# Altium PCB DCM_Flyback.PcbDoc
Units mil, origin at the board's own origin, x right, y up, seen from the top; angles counter-clockwise.
Board outline 5080 x 2800 mil, 2 copper layers (Top Layer, Bottom Layer), stack 61.756 mil thick; 39 components, 20 nets, 90 pads, 6 vias.
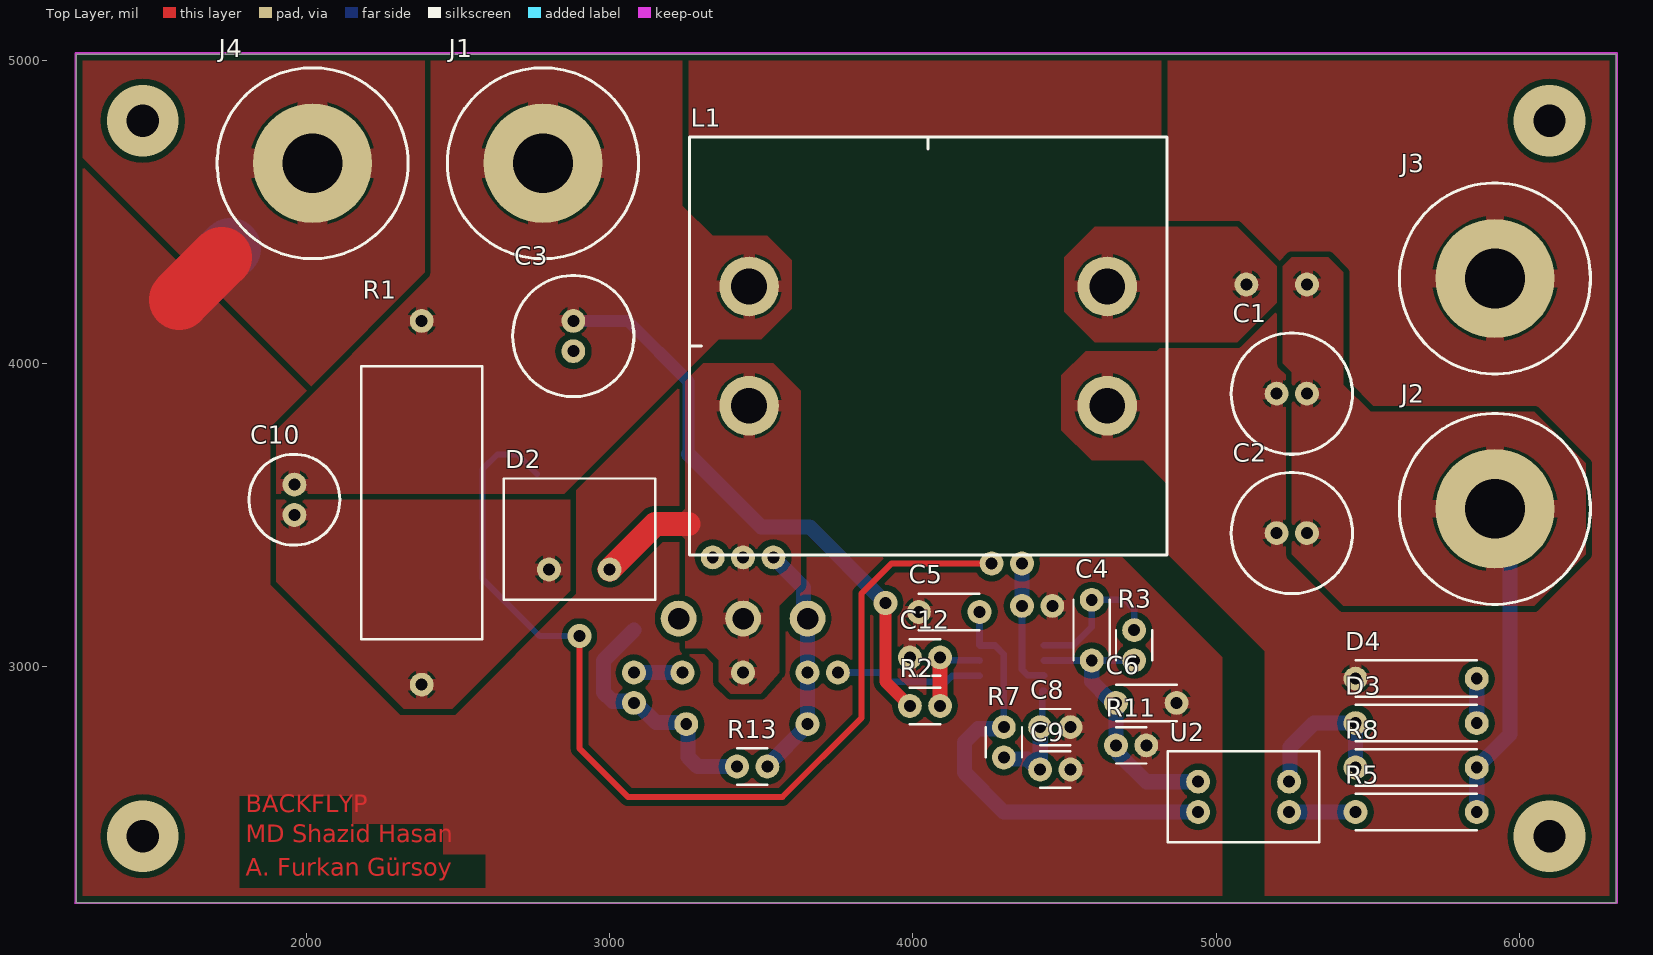
[diagram p0: Top Layer view]
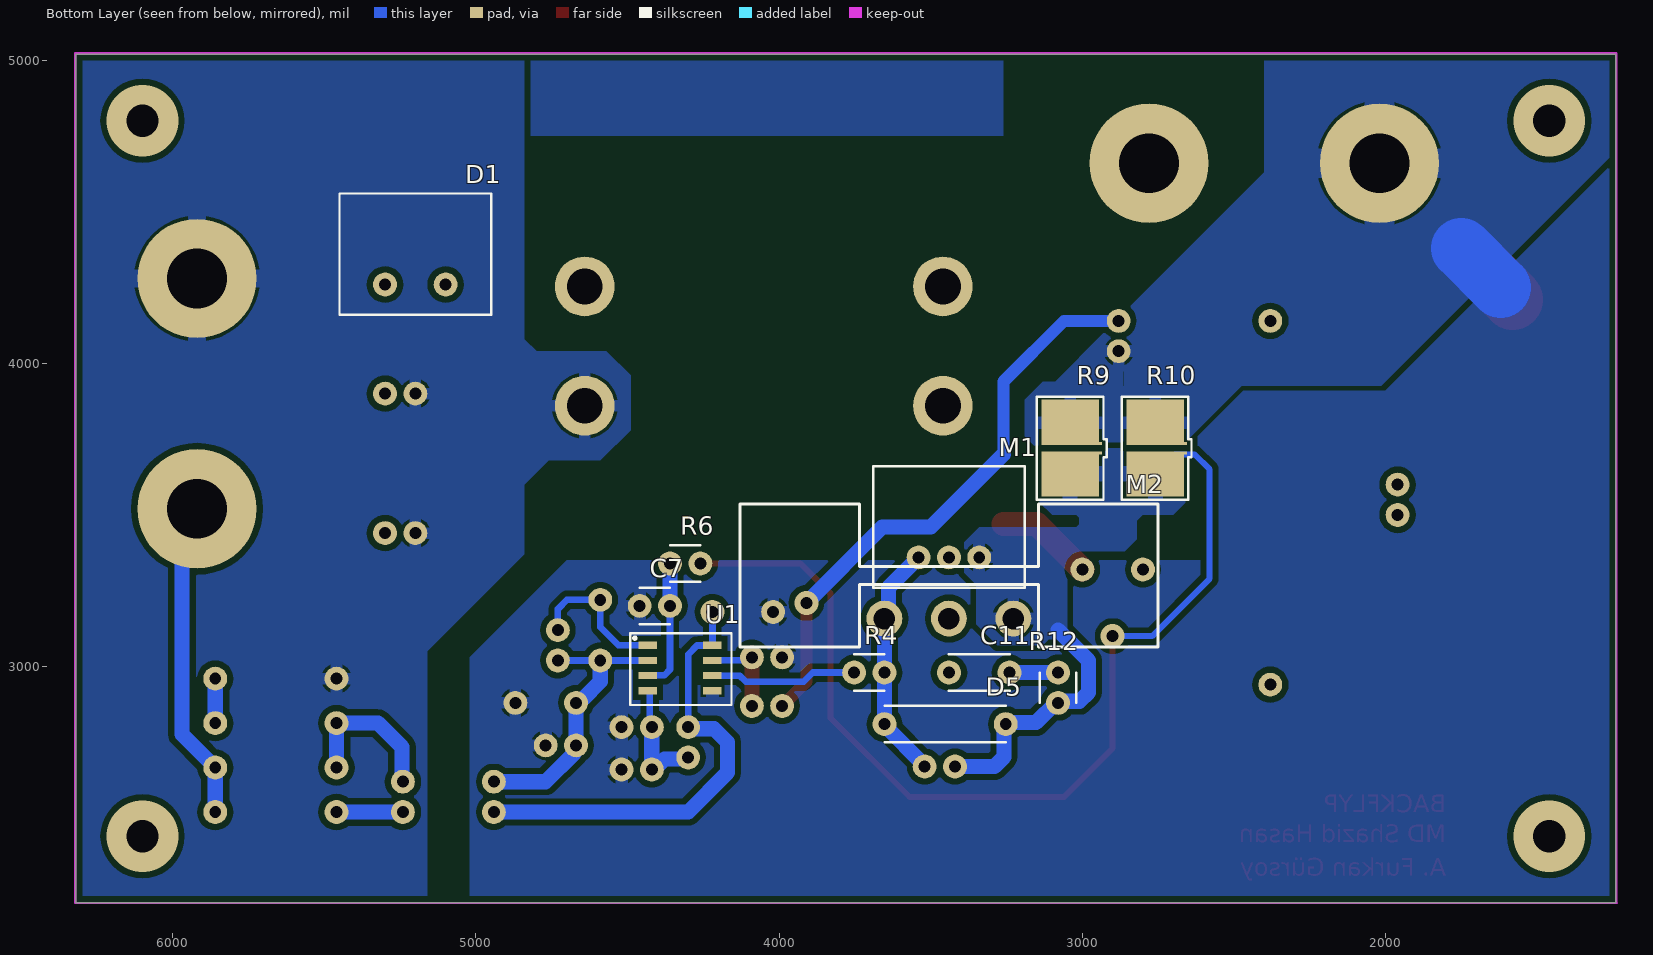
[diagram p1: Bottom Layer view, seen from below]

## Layer stack, top to bottom
Top Solder: solder mask 1, SM-001, Dk 4
Top Layer: signal copper 1.378
Dielectric 1: core 59, Core-043, Dk 4.3
Bottom Layer: signal copper 1.378
Bottom Solder: solder mask 1, SM-001, Dk 4

## Board outline
1240,2220 1240,5020 6320,5020 6320,2220

## Design rules (kind name [scope] priority, off if disabled: settings)
Clearance [All] p1: gap=20 ignorepadtopadclearanceinfootprint=FALSE
HoleSize [All] p1: absolutevalues=TRUE maxlimit=500 minlimit=1 maxpercent=80.000 minpercent=20.000
PolygonConnect [All] p1: connectstyle=Relief reliefconductorwidth=40 reliefentries=4 polygonreliefangle="90 Angle" airgapwidth=10
RoutingVias [All] p1: holewidth=28 width=50 viastyle="Through Hole" minholewidth=1 minwidth=1 maxholewidth=500 maxwidth=500
SilkToSilkClearance [All] p1: silktosilkclearance=0
SilkToSolderMaskClearance [IsPad] p1: minsilkscreentomaskgap=0 clearancetoexposedcopper=TRUE
SolderMaskExpansion [All] p1: expansion=4 istentingtop=FALSE
Width [All] p1: maxlimit=500 minlimit=10 preferedwidth=30 minimp=50.000000 maximp=50.000000 favimp=50.000000
27 further rules are at their usual default settings.

## Components (designator, comment, footprint, x,y, rotation, side; value= is the part's Value field where it differs from the comment)
C1 "100uF-63V" 100UF-63V 5300,3900 r270 top
C2 "100uF-63V" 100UF-63V 5300,3440 r270 top
C3 "100uF-63V" 100UF-63V 2880,4140 r0 top
C4 "Capacitor_lentil_100n" CAP-LENTIL-100N 4590,3220 r270 top
C5 "Capacitor_lentil_100n" CAP-LENTIL-100N 4220,3180 r180 top
C6 "Capacitor_lentil_100n" CAP-LENTIL-100N 4670,2880 r0 top
C7 "2.2nF" CAP-LENTIL-2.2N 4360,3200 r0 bottom
C8 "2.2.nF" CAP-LENTIL-2.2N 4420,2800 r0 top
C9 "2.2.nF" CAP-LENTIL-2.2N 4420,2660 r0 top
C10 "20uF-50V" 20uF-50V 1960,3600 r0 top
C11 "Capacitor_lentil_100n" Cap-lentil-100n 3440,2980 r180 bottom
C12 "2.2.nF" Cap-lentil-2.2n 3990,3030 r0 top
D1 "Secondary Diode" MBR10150 5300,4260 r180 bottom
D2 "Snubber Diode" MBR10150 2800,3320 r0 top
D3 "Zener" ZENER 5460,2813.33 r90 top
D4 "Zener" ZENER 5860,2960 r270 top
D5 "Zener" Zener 3652.6,2810 r90 bottom
J1 "4mm Con" CON-4MM 2780,4660 r270 top
J2 "4mm Con" CON-4MM 5920,3520 r0 top
J3 "4mm Con" CON-4MM 5920,4280 r0 top
J4 "4mm Con" CON-4MM 2020,4660 r270 top
L1 "Transformer" TRANSFORMER_EE3515 3263.15,4745.83 r0 top
M1 "MOSFET" MOSFET 3540,3360 r180 bottom
M2 "IRFP250N" "TO247 WITH HEATSINK" 3912.44,3300 r180 bottom
R1 "StoneRes" STONERES-5W 2380,4140 r0 top
R2 "IncRes" IncRes 3990,2870 r90 top
R3 "IncRes" IncRes 4730,3020 r180 top
R4 "IncRes" IncRes 3752.6,2980 r90 bottom
R5 "Resistor" RESISTOR 5860,2520 r270 top
R6 "IncRes" IncRes 4360,3340 r90 bottom
R7 "IncRes" IncRes 4300,2800 r0 top
R8 "Resistor" RESISTOR 5860,2666.67 r270 top
R9 "SMTDSB" ISB_SMT_V1_E 3040,3720 r270 bottom value=DSB
R10 "SMTDSB" ISB_SMT_V1_E 2760,3720 r270 bottom value=DSB
R11 "IncRes" IncRes 4770,2740 r270 top
R12 "IncRes" IncRes 3080,2980 r180 bottom
R13 "IncRes" IncRes 3420,2670 r90 top
U1 "UC3843AD" UC3843AD 4432.6,3070 r180 bottom
U2 "Opto" OPTO 5241.1,2520 r180 top

## Footprints (in the part's own frame and the unit in brackets; to place one, negate y for a bottom-side part, rotate by r counter-clockwise, add the part's x,y. Pads: shape width x height; smd on the part's side, far side on the other; paste and mask are expansions set on the pad)
20uF-50V [mm]
  round 2 hole 1: +(0,0) -(0,-2.54)
  silkscreen extent -3.81,-5.08 3.81,2.54
100UF-63V [mm]
  round 2 hole 1: +(0,0) -(0,-2.54)
  silkscreen extent -5.08,-6.35 5.08,3.81
CAP-LENTIL-2.2N [mm]
  round 2 hole 1: 1(0,0) 2(2.54,0)
  silkscreen extent 0,-1.52 2.54,1.52
Cap-lentil-2.2n [mm]
  round 2 hole 1: 1(0,0) 2(2.54,0)
  silkscreen extent 0,-1.52 2.54,1.52
CAP-LENTIL-100N [mm] "C?"
  round 2 hole 1: 1(0,0) 2(5.08,0)
  silkscreen extent 0,-1.52 5.08,1.52
Cap-lentil-100n [mm] "C?"
  round 2 hole 1: 1(0,0) 2(5.08,0)
  silkscreen extent 0,-1.52 5.08,1.52
CON-4MM [mm] "J?"
  round 10 hole 5: 1(0,0)
  silkscreen extent -8,-8 8,8
IncRes [mm]
  round 2 hole 1: 1(0,0) 2(0,-2.54)
  silkscreen extent -1.52,-2.54 1.52,0
ISB_SMT_V1_E [mil] "7.3 mm x 4.4 mm x 1.0 mm (max), Y:IKAHRAMAN, YT:23.11.2017,K:PPOSPOS,KT;18.12.2017"
  rect 150x190 smd: 1(-85,0) 2(85,0)
  rect 10x20 smd: 3(-15,95) 4(15,95)
  silkscreen extent -170,-110 170,120, body extent -140,-79 140,79, height 31
MBR10150 [mm]
  round 2 hole 1: A(5.08,0) C(0,0)
  silkscreen extent -3.81,-2.54 8.89,7.62
MOSFET [mm]
  round 2 hole 1: D(2.54,0) G(0,0) S(5.08,0)
  silkscreen extent -3.81,-2.54 8.89,7.62
OPTO [mm]
  round 2 hole 1: 1(0,0) 2(0,-2.54) 3(7.62,-2.54) 4(7.62,0)
  silkscreen extent -2.54,-5.08 10.16,2.54
RESISTOR [mm] "R?"
  round 2 hole 1: 1(0,0) 2(0,-10.16)
  silkscreen extent -1.52,-10.16 1.52,0
STONERES-5W [mm]
  round 2 hole 1: 1(0,0) 2(0,-30.48)
  silkscreen extent -5.08,-26.67 5.08,-3.81
"TO247 WITH HEATSINK" [mm]
  round 3 hole 1.8: D(12,-3.6) G(6.6,-3.6) S(17.4,-3.6)
  silkscreen extent -5.5,-6 29.5,6
TRANSFORMER_EE3515 [mm]
  round 5 hole 3: 1(5,-12.5) 2(5,-22.5) 3(35,-12.5) 4(35,-22.5)
  silkscreen extent 0,-35 40,0
UC3843AD [mm]
  rect 1.55x0.6 smd mask+0.07: 1(0,0) 2(0,-1.27) 3(0,-2.54) 4(0,-3.81) 5(5.4,-3.81) 6(5.4,-2.54) 7(5.4,-1.27) 8(5.4,0)
  silkscreen extent -1.5,-5 7,1
ZENER [mm]
  round 2 hole 1: A(0,-10.16) C(0,0)
  silkscreen extent -1.52,-10.16 1.52,0
Zener [mm]
  round 2 hole 1: A(0,-10.16) C(0,0)
  silkscreen extent -1.52,-10.16 1.52,0

## Part data
C7 C8 C9 C12: library part Cap-Lentil-2.2n
R9 R10: library part ISB_RES-SMT, "RES SMD 2817 1% 5W C", Manufacturer=Isabellenhutte, SAPPartNumber=DSB, Approved=EKARAGOZ, Checked/RevisedBy=CYEGIN, PackageDescription=DSB, PackageReference=SMT, Published=26-10-2017, Publisher=PPOSPOS, Version=1.0

## Via types
v1: diameter 236.22, hole 106.3, Top Layer to Bottom Layer, 4 vias
v2: diameter 78.74, hole 39.37, Top Layer to Bottom Layer, 2 vias

## Nets (pads, with @x,y where several pads share a name; then routed paths per layer and width w, separated by ;. In a path a pad name is that pad's centre, name@x,y a point inside that pad or via, vN(x,y) a via of type N, cw(c..) or ccw(c..) an arc to the next point about the centre after c; other vN are vias at no path point)
FB: C4.2 C6.1 R3.1 R11.2 U1.2 U2.3 | length 948.5
  Bottom Layer w22: U1.2 C4.2 R3.1
  Bottom Layer w50: C4.2 4590,2950 4645.63,2894.37 4647.85,2894.37 4662.22,2880 C6.1 R11.2 4675.5,2734.5 4675.5,2715.18 4770.68,2620 U2.3
GND: C3.- C5.2 C6.2 C7.2 C8.2 C9.2 C12.1 J4.1 R9.1 R9.3 R10.1 R10.3 R11.1 U1.5 | length 381.8
  Top Layer w200: 1580,4210 1720,4350
  Bottom Layer w200: 1620,4250 1750,4380
NetC4_1: C4.1 R3.2 U1.1 | length 494.7
  Bottom Layer w22: U1.1 4530,3070 4590,3130 C4.1 4700,3220 4730,3190 R3.2
NetC7_1: C7.1 R6.1 U1.3 | length 430.9
  Bottom Layer w22: C7.1 4360,2990 4379.19,2970.81 4431.79,2970.81 U1.3
  Bottom Layer w50: C7.1 R6.1
NetC8_1: C8.1 C9.1 R7.2 U1.4 | length 405
  Bottom Layer w22: C8.1 4426.3,2806.3 4426.3,2919.19 4427.11,2920 U1.4
  Bottom Layer w50: R7.2 4305.5,2694.5 4377.72,2694.5 4412.22,2660 C9.1 C8.1
NetC10_-: C10.- D2.C R1.2
NetC11_1: C11.1 D2.A L1.2 M1.D M2.D | length 322.1
  Top Layer w80: D2.A 3150,3470 3260,3470
NetC11_2: C11.2 R12.1 | length 160
  Bottom Layer w50: R12.1 C11.2
NetC12_2: C12.2 R2.2 U1.7 | length 294.1
  Top Layer w50: R2.2 C12.2
  Bottom Layer w22: C12.2 4099.19,3020.81 4219.19,3020.81 U1.7
NetD1_A: D1.A L1.3
NetD3_A: D3.A D4.C | length 146.7
  Bottom Layer w50: D3.A D4.C
NetD3_C: D3.C R8.2 U2.2 | length 510.7
  Bottom Layer w50: U2.2 5244.37,2623.27 5244.37,2734.37 5323.33,2813.33 D3.C R8.2
NetD5_A: D5.A M1.S M2.S R6.2 R9.2 R9.4 R10.2 R10.4 R12.2 R13.1 | length 4189.9
  Top Layer w20: v2(2900,3100) 2900,2730 3060,2570 3570,2570 3830,2830 3830,3240 3930,3340 R6.2
  Bottom Layer w20: R10.2 2695,3700 2665,3700 2630,3700 2580,3650 2580,3290 2770,3100 v2(2900,3100)
  Bottom Layer w50: 3080,3120 2980,3020 2980,2914.79 3009.29,2885.5 3074.5,2885.5 R12.2 3087.78,2880 3152.28,2815.5 3247.1,2815.5 D5.A 3258.1,2804.5 3258.1,2701.9 3290,2670 R13.1
NetD5_C: D5.C M1.G M2.G R4.2 R13.2 | length 791.6
  Bottom Layer w50: R13.2 3520,2673.7 3652.6,2806.3 D5.C R4.2 M2.G 3639.57,3171.3 3639.57,3260.43 M1.G
NetR4_1: R4.1 U1.6 | length 488.1
  Bottom Layer w22: R4.1 3888.98,2980 3918.98,2950 4110.24,2950 4130.24,2970 U1.6
NetR5_2: R5.2 U2.1 | length 218.9
  Bottom Layer w50: U2.1 R5.2
S_GND: C1.- C2.- D4.A J3.1 L1.4
Vin: C3.+ C10.+ J1.1 L1.1 R1.1 R2.1 | length 1928.9
  Top Layer w40: v2(3910,3210) 3910,2950 R2.1
  Bottom Layer w40: C3.+ 3060,4140 3260,3940 3260,3700
  Bottom Layer w50: 3260,3700 3500,3460 3660,3460 v2(3910,3210)
Vout: C1.+ C2.+ D1.C J2.1 R5.1 R8.1 | length 1066.3
  Bottom Layer w50: R5.1 R8.1 5970,2776.67 5970,3470 J2.1
Vref: C5.1 R7.1 U1.8 U2.4 | length 1518.1
  Bottom Layer w22: C5.1 U1.8 4220.81,3069.19 4270.81,3069.19 4300,3040 R7.1
  Bottom Layer w50: R7.1 4294.5,2794.5 4214.5,2794.5 4170,2750 4170,2650 4300,2520 U2.4
copper on no net:
  other v1: 1460,2440 6100,2440 1460,4800 6100,4800

## Polygon pours and split planes (outlines as drawn)
no net on Top Layer "NONET_L01_P031" (solid, pour order 31): 3250,5020 3250,4750 4820,4750 4820,5020
GND on Top Layer "Top Layer-GND" (solid, pour order 53): 1240,2220 5020,2220 5020,3030 4690,3360 3640,3360 3640,3270 3570,3200 3570,2960 3510,2900 3400,2900 3350,2950 3350,3020 3320,3050 3240,3050 3240,3940 2890,3590 2890,3240 2490,2840 2310,2840 1880,3270 1880,3350 1879.61,3350 1879.61,3789.61 2000,3910 1240,4670 1240,3350
NetC11_1 on Top Layer "Top Layer-NetC11_1" (solid, pour order 41): 3320,3060 3360,3020 3360,2950 3400,2910 3498.75,2910 3560,2980 3560,3200 3630,3270 3630,3910 3540,4000 3300,4000 3250,3950 3250,3520 3220,3490 3220,3450 3250,3420 3250,3060
Vin on Top Layer "Top Layer-Vin" (solid, pour order 28): 1900,3780 1900,3560 2840,3560 3360,4080 3500,4080 3600,4180 3600,4340 3520,4420 3340,4420 3240,4520 3240,4750 3240,5020 3240,4770 3240,5020 2400,5020 2400,4280
GND on Top Layer "GND_L01_P021" (solid, pour order 21): 1240,5020 2390,5020 2390,4300 2015,3925 1240,4700
S_GND on Top Layer "S_GND_L01_P019" (solid, pour order 19): 4840,5020 6320,5020 6320,2220 5160,2220 5160,3050 4840,3370 4840,3600 4760,3680 4590,3680 4490,3780 4490,3960 4570,4040 4805,4040 4840,4075
Vout on Top Layer "VOUT_L01_P017" (solid, pour order 17): 5220,4320 5220,4000 5250,3970 5250,3370 5420,3200 6050,3200 6220,3370 6220,3670 6050,3840 5510,3840 5420,3930 5420,4300 5370,4350 5250,4350
NetD1_A on Top Layer "NETD1_A_L01_P015" (solid, pour order 15): 4500,4350 4600,4450 5070,4450 5200,4320 5200,4200 5070,4070 4600,4070 4500,4170
NetC10_- on Top Layer "NETC10_-_L01_P002" (solid, pour order 2): 2870,3550 2870,3540 2870,3250 2480,2860 2320,2860 1900,3280 1900,3550
no net on Bottom Layer "NONET_L02_P054" (solid, pour order 54): 3260,5020 3260,4750 4820,4750 4820,5020
GND on Bottom Layer "Bottom Layer-GND" (solid, pour order 51): 1240,2220 5020,2220 5020,3030 4700,3350 2560,3350 2549.74,3360.26 2549.74,3649.74 2620,3720 2620,3760 2470,3910 2000,3910 1240,4670
NetD5_A on Bottom Layer "Bottom Layer-NetD5_A" (solid, pour order 8): 2660,3680 2660,3540 2700,3500 2800,3500 2820,3480 2820,3420 2860,3380 3000,3380 3050,3330 3050,3120 3080,3090 3110,3090 3130,3070 3280,3070 3350,3140 3350,3270 3390,3310 3390,3410 3340,3460 3020,3460 3010,3470 3010,3490 3020,3500 3100,3500 3140,3540 3140,3720 2870,3720 2830,3680
GND on Bottom Layer "Bottom Layer-GND 1" (solid, pour order 48): 1240,4700 2014.67,3925.33 2474.67,3925.33 2680,3720 3150,3720 3190,3760 3190,3880 3130,3940 3090,3940 2865.33,4164.67 2865.33,3925.33 2865.33,4164.67 2400,4630 2400,5020 1240,5020
S_GND on Bottom Layer "S_GND_L02_P042" (solid, pour order 42): 4840,5020 6320,5020 6320,2220 5160,2220 5160,3050 4840,3370 4840,3600 4760,3680 4590,3680 4490,3780 4490,3960 4570,4040 4800,4040 4840,4080

## Keep-outs
Keep-Out Layer:
  lines w7.87: 1237,2220 1238,2221 1238,5023 6322,5023 6322,2220 6321,2220 1237,2220

## Other copper
Top Layer:
  pour cut-out: 3240,5020 3240,4770
  text "BACKFLYP" at 1800,2500 h98.43
  text "MD Shazid Hasan" at 1800,2400 h98.43
  text "A. Furkan Gürsoy" at 1800,2290 h98.43

## Silkscreen, mask and mechanical layers (free items; w line width, h text height)
Mechanical 1:
  the board outline again, w7.87